# Altium PCB CC3D_V2.PcbDoc (part 2 of 2)
Units mil, origin at the board's own origin, x right, y up, seen from the top; angles counter-clockwise.
Board outline 1417.32 x 1417.32 mil, 2 copper layers (Top Layer, Bottom Layer), stack 61.2 mil thick; 68 components, 0 nets, 260 pads, 77 vias.
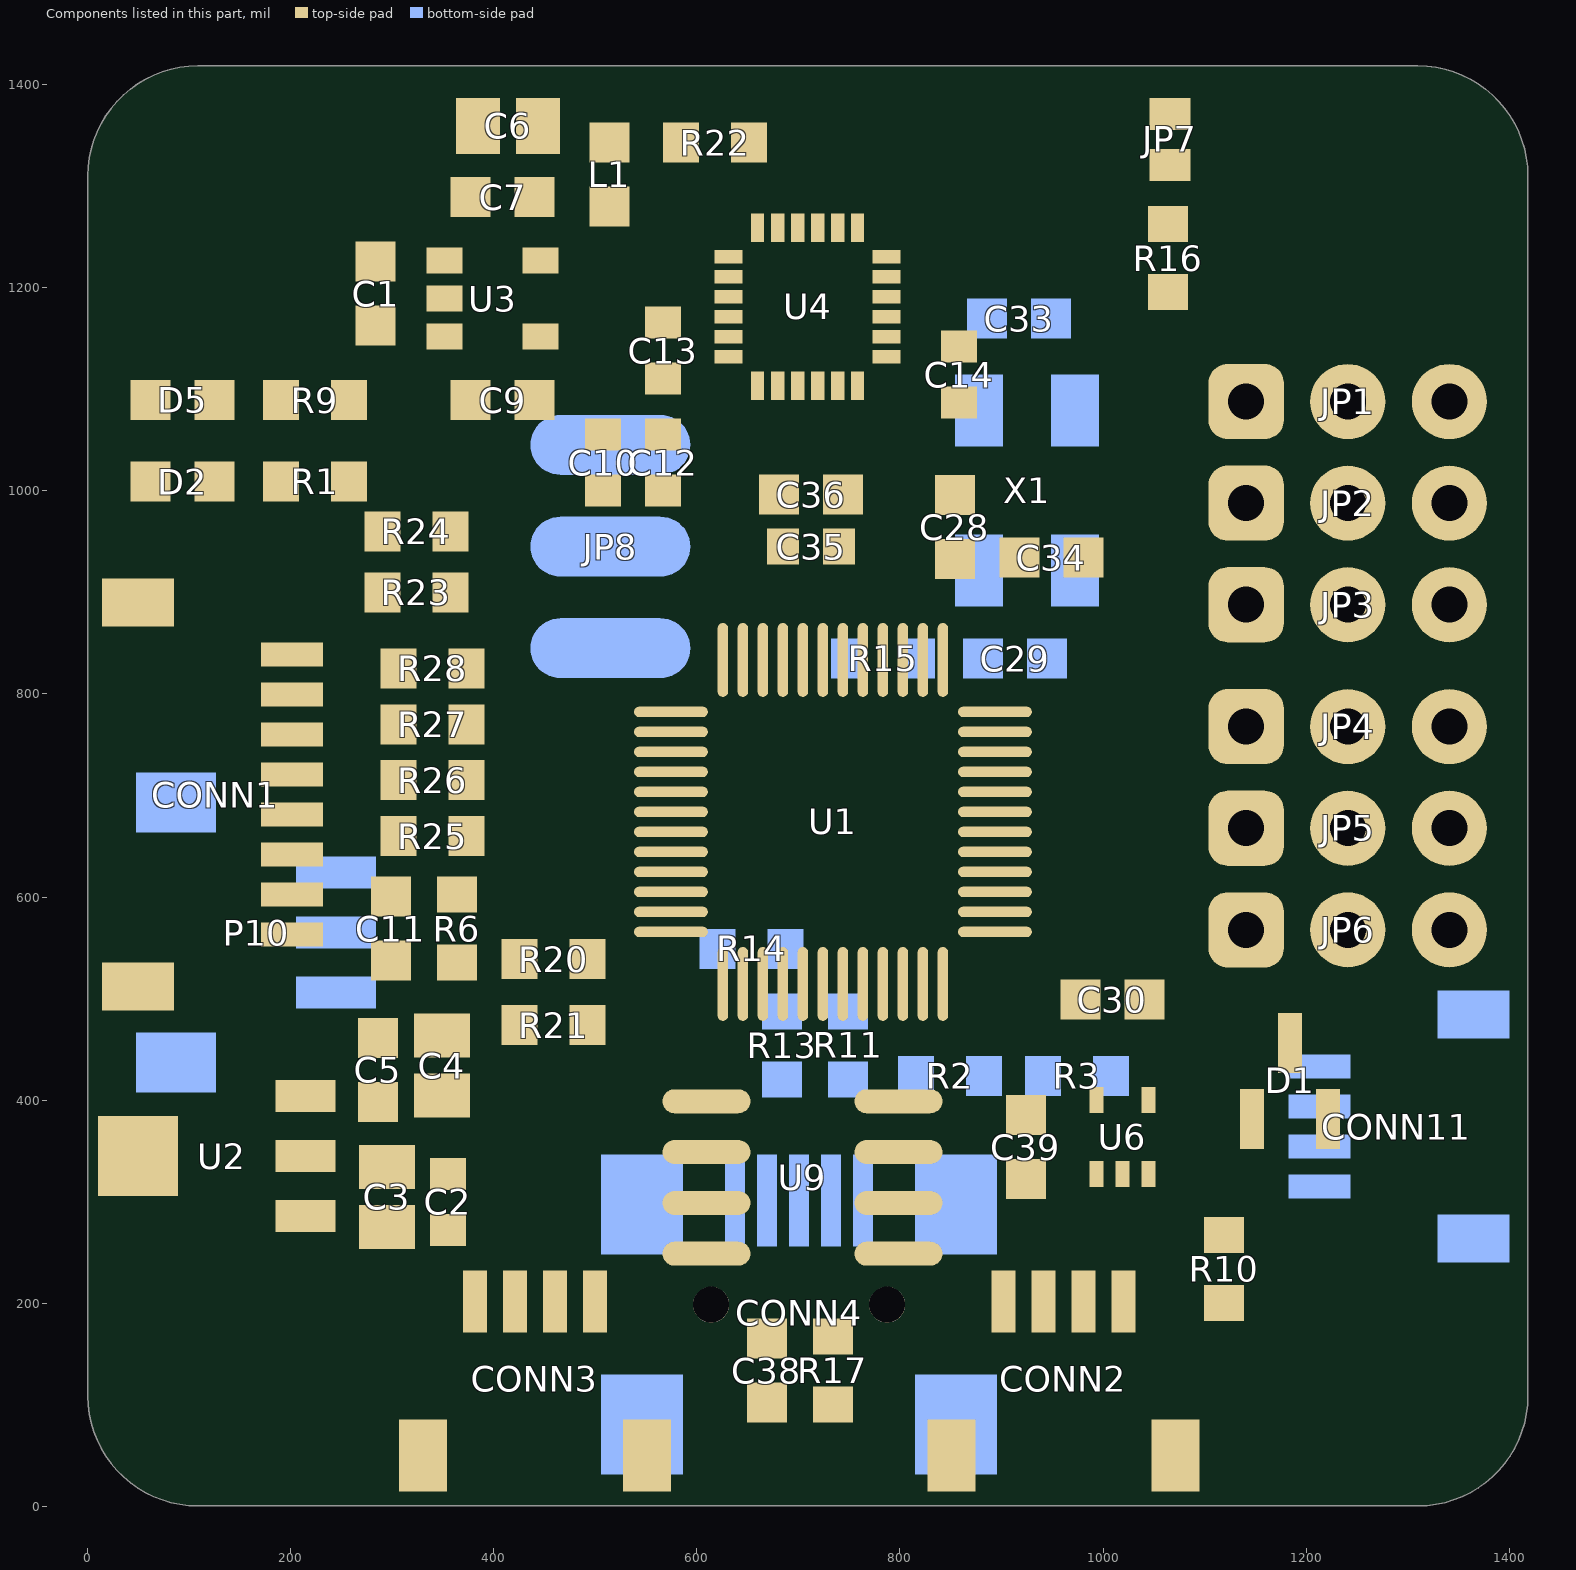
[diagram p2: the components of this part, seen from the top]

## Via types
v1: diameter 28, hole 12, Top Layer to Bottom Layer, tented both sides, 66 vias
v2: diameter 23.62, hole 12, Top Layer to Bottom Layer, tented both sides, 6 vias
v3: diameter 23.62, hole 15.75, Top Layer to Bottom Layer, tented both sides, 5 vias

## Nets (pads, with @x,y where several pads share a name; then routed paths per layer and width w, separated by ;. In a path a pad name is that pad's centre, name@x,y a point inside that pad or via, vN(x,y) a via of type N, cw(c..) or ccw(c..) an arc to the next point about the centre after c; other vN are vias at no path point) (continued)
copper on no net: | length 51734.3
  Top Layer w8: v1@229.15,467.7 ccw(c212.08,484.77) 236.22,484.77 ccw(c260.36,484.77) v1@243.29,467.7 ; v1(236.22,460.63) 236.22,503.94 265.31,533.03 265.31,561.57 299,595.26 ; 268.52,564.78 ccw(c232.8,600.5) 283.31,600.5 ; 281.16,577.42 cw(c299,559.59) 299,584.81 ; 282.18,578.44 ccw(c260.12,600.5) 291.31,600.5 ; v1(503.94,744.09) 522.43,762.58 574.55,762.58 ; v1@503.94,754.09 ccw(c503.94,778.24) 521.01,761.17 ccw(c538.08,744.09) v1@513.94,744.09 ; v1@505.13,782.27 574.55,782.27 ; v1@511.01,776.39 cw(c525.19,762.21) 525.19,782.27 ; v1@511.01,790.54 ccw(c530.97,810.5) 530.97,782.27 ; 574.55,703.53 668.09,703.53 v2(692.91,728.35) ; 574.55,723.21 v2@652.35,723.21 ; 574.55,742.9 v2@624.79,742.9 ; 574.95,1330.85 cw(c556.29,1312.19) 582.68,1312.19 ; v1@575.61,1259.04 ccw(c558.54,1276.11) 582.68,1276.11 ccw(c606.82,1276.11) v1@589.75,1259.04 ; v1(582.68,1204.72) 596.82,1204.72 ; 582.68,1302.68 cw(c622.51,1302.68) 594.35,1330.85 ; 582.68,1322 cw(c603.2,1322) 588.69,1336.51 ; 582.68,1342.52 v1(582.68,1251.97) 582.68,1241.49 613.48,1210.69 631.24,1210.69 ; v1@582.98,1202.75 cw(c587.17,1175.79) 606.46,1195.08 ; v1@584.68,1251.97 ccw(c614.79,1251.97) 593.5,1230.67 ; v1@592.11,1201.39 cw(c596.82,1199.73) 596.82,1204.72 ; v1@592.11,1208.06 ccw(c596.82,1209.72) 596.82,1204.72 ; v1@592.68,1251.97 ccw(c642.11,1251.97) 607.15,1217.02 ; 598.67,742.9 ccw(c598.67,779.28) v2@624.4,753.55 ; 617.98,742.9 ccw(c617.98,759.97) v2@630.05,747.9 ; v1@619.42,1105.97 ccw(c596.79,1131.95) 631.24,1131.95 631.24,1103.69 v1(625.98,1098.43) ; v1@624.67,1099.93 ccw(c612.09,1114.38) 631.24,1114.38 ; 625.73,833.45 625.73,791.59 645.67,771.65 v2(704.72,771.65) v2@700.79,771.65 ; 626.23,723.21 ccw(c626.23,759.59) v2@651.96,733.87 ; 631.24,1191.01 610.54,1191.01 596.82,1204.72 ; 645.55,723.21 ccw(c645.55,740.28) v2@657.61,728.21 ; v2@685.1,728.35 cw(c666.24,728.35) 679.58,715.01 cw(c692.91,701.68) v2@692.91,720.54 ; v2@699.2,766.13 ccw(c685.87,752.8) 685.87,771.65 ccw(c685.87,790.51) v2@699.2,777.18 ; 724.16,514.55 724.16,468.84 769,424 924,424 925.21,425.21 1005.27,425.21 1012.3,418.18 1012.3,382.65 1005.27,375.62 1000.62,375.62 964,339 964,285 980.42,268.58 980.42,201.84 ; 724.16,833.45 724.16,791.59 771.75,744 807.86,744 814,737.86 v1(814,744) ; v1@733.09,890.57 cw(c713.08,870.56) 741.37,870.56 ; v1(740.16,897.64) 741.37,896.42 741.37,835.92 743.84,833.45 ; 741.37,873.54 ccw(c752.74,873.54) 744.7,865.51 ; 741.37,876.43 cw(c761.36,876.43) v1@747.23,890.57 ; 743.84,514.55 743.84,474.16 774,444 1009.11,444 1044.59,408.52 1044.59,400.42 ; 745.06,483.35 ccw(c770.19,483.35) 752.42,465.58 ; 764.47,832.5 763.53,833.45 763.53,881.64 ; v1@769.54,897.17 cw(c748.96,896.2) 763.53,881.64 ; v1@779.06,887.65 ccw(c778.09,867.07) 763.53,881.64 ; v1(779.53,897.64) 763.53,881.64 ; 786.76,1210.69 816.87,1210.69 v1(822.83,1204.72) ; 786.76,1230.38 805.18,1230.38 v1(822.83,1248.03) ; 802.9,514.55 802.9,470.1 809,464 1084,464 v1(1084,459) ; v1@806.93,736.93 ccw(c789.86,719.86) 789.86,744 ccw(c789.86,768.14) v1@806.93,751.07 ; v1@812.83,1248.03 cw(c788.69,1248.03) 805.76,1230.96 cw(c822.83,1213.89) v1@822.83,1238.03 ; 893.72,566 1031.25,566 1089,508.25 1089,494 v1@1120,463 ; 974.89,226.06 ccw(c961.56,239.39) 980.42,239.39 ccw(c999.28,239.39) 985.94,226.06 ; 991.37,319.63 cw(c986.43,314.7) 993.41,314.7 cw(c1000.39,314.7) 995.45,319.63 ; 993.41,307.33 ccw(c1017.33,307.33) v1@1000.41,290.41 ; 993.41,326.64 ccw(c1036.64,326.64) v1@1006.07,296.07 ; 993.41,327.58 993.41,284.59 994,284 v1(999,289) ; 1038.11,415 cw(c1029.42,406.32) 1041.7,406.32 ; 1047.79,464 cw(c1047.79,422.79) v1@1076.93,451.93 ; 1067.1,464 cw(c1067.1,442.1) v1@1082.59,457.59 ; 1100.1,482.9 cw(c1076.2,459) v1@1110,459 ; 1109.76,473.24 ccw(c1120,483.49) v1@1120,469
  Top Layer w10: 178.32,558.12 ccw(c166.69,546.49) 166.69,562.94 ccw(c166.69,579.38) 178.32,567.75 ; 201.84,562.94 165.06,562.94 104.53,623.47 104.53,794.41 149.69,839.58 149.69,874.69 175,900 290.53,900 ; 201.84,602.31 235.69,602.31 ; 201.84,641.68 251.68,641.68 270,660 306.53,660 ; 201.84,681.05 246.05,681.05 280,715 ; 201.84,720.42 235.42,720.42 ; 201.84,759.79 239.79,759.79 276.59,796.59 276.59,816.59 285,825 ; 218.77,604.97 cw(c225.73,594.48) 234.62,603.38 ; 220.36,605.49 cw(c221.76,579.67) 240.04,597.96 ; 220.54,717.23 ccw(c220.54,745.46) 240.5,725.5 ; 220.54,727.23 ccw(c220.54,779.6) 257.57,742.57 ; 224.3,596.63 cw(c232.62,584.08) 243.27,594.73 ; 225.35,636.86 cw(c236.98,625.23) 236.98,641.68 cw(c236.98,658.12) 225.35,646.49 ; 225.35,676.23 cw(c236.98,664.6) 236.98,681.05 cw(c236.98,697.49) 225.35,685.86 ; 225.35,754.97 cw(c236.98,743.34) 236.98,759.79 cw(c236.98,776.23) 225.35,764.6 ; 225.63,597.79 cw(c235.69,588.85) 235.69,602.31 ; 225.63,606.83 ccw(c235.69,615.76) 235.69,602.31 ; 225.69,715.97 cw(c235.42,707.57) 235.42,720.42 ; 225.69,724.87 ccw(c235.42,733.27) 235.42,720.42 ; v2@235.34,231.4 cw(c223.71,219.78) 240.16,219.78 cw(c256.6,219.78) v2@244.97,231.4 ; v2(240.16,236.22) 240.16,145.67 279.53,106.3 582.68,106.3 592.52,96.46 592.52,33.46 603.25,22.73 794.39,22.73 811.02,39.37 811.02,94.26 817.76,101 1104.61,101 v3(1119,86.61) ; 244.71,729.71 cw(c306.53,667.88) 306.53,755.32 ; 257.47,1074.32 cw(c257.47,1047.23) 276.62,1066.38 ; 257.47,1089 257.47,1085.53 324,1019 324,871 335,860 425,860 455.37,829.63 v1(455.37,790.82) ; 261.78,746.78 cw(c306.53,702.02) 306.53,765.32 ; 270.18,1087.03 ccw(c304.5,1087.03) 280.23,1062.77 ; 274.23,759.23 cw(c286.86,746.61) 298.35,760.27 ; 274.23,814.23 cw(c286.86,801.61) 298.35,815.27 ; 275.05,815.05 cw(c294.21,795.89) 305.41,820.56 ; 278.85,763.85 cw(c306.53,736.16) 306.53,775.32 ; 281.54,891.01 ccw(c259.83,869.3) 259.83,900 ccw(c259.83,930.7) 281.54,908.99 ; 281.54,951.01 ccw(c259.83,929.3) 259.83,960 ccw(c259.83,990.7) 281.54,968.99 ; 281.94,766.94 cw(c293.9,754.98) 304.79,767.92 ; 281.94,821.94 cw(c293.9,809.98) 304.79,822.92 ; 285.26,825.26 cw(c300.58,809.93) 309.55,829.66 ; 290.53,960 205,960 131.69,886.69 131.69,847.03 84,799.34 84,614 164,534 239,534 248.31,543.31 248.31,589.69 235.69,602.31 ; 295.4,763.86 ccw(c285,758.13) 285,770 ; 295.4,776.14 cw(c285,781.87) 285,770 ; 295.4,818.86 ccw(c285,813.13) 285,825 ; 295.4,831.14 cw(c285,836.87) 285,825 ; 296.62,707.04 ccw(c280,693.68) 280,715 ; 296.62,722.97 cw(c280,736.32) 280,715 ; 297.54,651.01 ccw(c275.83,629.3) 275.83,660 ccw(c275.83,690.7) 297.54,668.99 ; 299,595.26 299,600.5 362.03,600.5 364,602.47 402.47,602.47 444.47,644.47 574.55,644.47 ; 306.53,715 280,715 ; 306.53,770 285,770 ; 306.53,825 285,825 ; 309.38,590.11 cw(c334.45,565.04) 334.45,600.5 cw(c334.45,635.95) 309.38,610.88 ; 319,1225.5 319,1159 326.4,1151.6 351.76,1151.6 ; 326.57,600.5 ccw(c326.57,637.92) 353.04,611.46 ; 336.09,600.5 cw(c336.09,576.52) 353.04,593.47 ; 341.32,1146.09 ccw(c328.02,1132.78) 328.02,1151.6 ccw(c328.02,1170.42) 341.32,1157.11 ; 357.46,900 623.62,900 645.42,878.2 645.42,833.45 ; 357.46,960 390.39,960 432.39,918 633.18,918 665.1,886.08 665.1,833.45 ; 366.46,891.01 cw(c388.17,869.3) 388.17,900 cw(c388.17,930.7) 366.46,908.99 ; 366.46,951.01 cw(c388.17,929.3) 388.17,960 cw(c388.17,990.7) 366.46,968.99 ; 373.46,715 410,715 441.16,683.84 574.55,683.84 ; 373.46,770 400,770 ; 373.46,825 415,825 425,815 425,780 450,755 ; 374,659 409,659 414,664 574.39,664 574.55,664.16 ; 374.96,593.47 cw(c396.67,571.76) 396.67,602.47 cw(c396.67,633.17) 374.96,611.46 ; 382.46,649.04 cw(c406.5,625) 406.5,659 ; 382.46,667.02 ccw(c401.83,686.4) 401.83,659 ; 382.46,706.01 cw(c404.17,684.3) 404.17,715 cw(c404.17,745.7) 382.46,723.99 ; 382.46,816.01 cw(c404.17,794.3) 404.17,825 cw(c404.17,855.7) 382.46,833.99 ; 383.38,762.04 cw(c400,748.68) 400,770 ; 383.38,777.97 ccw(c400,791.32) 400,770 ; 398.7,502.95 ccw(c364.62,537.03) 412.82,537.03 ; 415.77,520.02 ccw(c398.77,537.03) 422.82,537.03 ; 416.2,520.45 cw(c425.53,511.11) 425.53,524.31 ; 416.54,463.04 cw(c394.84,441.33) 425.54,441.33 cw(c456.24,441.33) 434.53,463.04 ; 416.54,549.96 ccw(c394.83,571.67) 425.53,571.67 ccw(c456.24,571.67) 434.53,549.96 ; 425.54,488.68 ccw(c425.54,524.14) 450.6,499.07 ; 429.76,740.24 cw(c403.52,714) v1@440.63,714 ; 430.77,774.23 ccw(c462.85,806.31) v1@464.28,760.96 ; 438.25,475.97 cw(c464.2,475.97) 445.85,494.32 ; v1(440.94,996.06) 503.94,996.06 507.87,1000 566.93,1000 ; 443.27,726.73 400,770 ; 447.11,757.89 ccw(c463.85,774.64) v1@464.6,750.97 ; v1@447.31,989.7 cw(c462.67,974.34) 462.67,996.06 cw(c462.67,1017.79) v1@447.31,1002.43 ; v1@449,797.18 ccw(c433.64,812.55) 455.37,812.55 ccw(c477.09,812.55) v1@461.73,797.18 ; 455.6,225.35 ccw(c443.97,236.98) 460.42,236.98 ccw(c476.86,236.98) 465.23,225.35 ; v3@455.81,577.86 cw(c448.12,570.17) 459,570.17 ; 459,562.3 cw(c481.01,562.3) v3@465.45,577.86 ; 460.42,201.84 460.42,282.58 440,303 440,365 394.82,410.18 394.82,499.07 425.53,529.78 425.53,539 425.53,585.53 464.79,624.79 574.55,624.79 ; v3@460.63,589.49 ccw(c460.63,610.87) 475.75,595.75 ; v3@467.44,582.68 cw(c478.94,582.68) 470.81,590.81 ; 470.45,996.06 ccw(c470.45,1035.45) 498.31,1007.6 ; 489.46,996.06 cw(c489.46,983.55) 498.31,992.4 ; 492.47,539 519.2,565.73 574.55,565.73 ; 492.47,553.68 ccw(c492.47,589.14) 517.53,564.07 ; 494.97,225.35 ccw(c483.34,236.98) 499.79,236.98 ccw(c516.23,236.98) 504.6,225.35 ; 496.06,1080.69 ccw(c531.47,1080.69) 506.43,1055.65 ; 496.06,1104.83 ccw(c555.61,1104.83) 513.51,1062.72 ; 499.79,201.84 499.79,284 465,318.79 465,370 425.54,409.46 425.54,474 459,507.46 459,579 485.1,605.1 574.55,605.1 ; 503.62,1269.28 cw(c478.55,1244.22) 514,1244.22 cw(c549.45,1244.22) 524.38,1269.28 ; 505.18,540.97 cw(c531.13,540.97) 512.78,559.32 ; 510.37,1054.59 cw(c530.66,1034.31) 530.66,1062.99 ; 514,1279.67 514,1155.73 496.06,1137.8 496.06,1062.99 645.67,1062.99 659.79,1077.11 659.79,1103.41 ; 517.44,992.4 cw(c535.79,974.05) 535.79,1000 cw(c535.79,1025.94) 517.44,1007.6 ; 517.44,1047.52 cw(c554.8,1010.16) 554.8,1062.99 ; 520,1062.99 cw(c520,1010.16) 557.36,1047.52 ; v1(527.56,1110.24) 566.93,1110.24 608.33,1151.64 631.24,1151.64 ; v1@533.92,1103.87 cw(c549.29,1088.51) 549.29,1110.24 cw(c549.29,1131.96) v1@533.92,1116.6 ; 544.15,1062.99 cw(c544.15,1034.3) 564.43,1054.59 ; 557.36,992.4 ccw(c539.01,974.05) 539.01,1000 ccw(c539.01,1025.95) 557.36,1007.6 ; 557.36,1102.64 ccw(c539.01,1084.29) 539.01,1110.24 ccw(c539.01,1136.18) 557.36,1117.84 ; 568.9,1120.98 ccw(c568.9,1142.18) 583.89,1127.19 ; 569.43,1054.59 cw(c589.71,1034.3) 589.71,1062.99 ; 573.2,344.18 ccw(c561.57,332.56) 561.57,349 ccw(c561.57,365.44) 573.2,353.82 ; 574.55,585.42 662.32,585.42 v1(667.58,590.68) ; 576.5,1047.52 cw(c613.86,1010.16) 613.86,1062.99 ; 579.65,1110.24 cw(c610.35,1110.24) 588.64,1131.94 ; 609.51,349 554,349 535.2,367.8 535.2,425.2 569,459 629,459 645.42,475.42 645.42,514.55 ; 609.51,399 659,399 684.79,424.79 684.79,514.55 ; 614.71,479 ccw(c614.71,494.38) 625.58,483.5 ; 624,484 619,479 ; 625.53,483.43 cw(c619,486.03) 619,479 ; 633.14,585.42 ccw(c633.14,625.13) v1@661.22,597.05 ; v1@634,623 ccw(c634,640.34) 646.26,628.08 ; v1(634,654) 634,659 648.32,673.32 ; 639.44,469.44 ccw(c625.53,483.35) 645.2,483.35 ; v1@642.85,655.65 cw(c662.33,659.3) 648.32,673.32 ; v1@643,614 cw(c669.11,614) 650.65,632.46 ; 645.82,394.18 cw(c657.45,382.56) 657.45,399 cw(c657.45,415.44) 645.82,403.82 ; 665.1,514.55 665.1,455.1 644,434 574,434 553.2,413.2 553.2,384.8 563.81,374.19 650.91,374.19 665.82,359.28 726.09,299 798.49,299 ; 669,102.5 669.43,102.5 v3(685.04,118.11) ; 670.72,985.68 cw(c636.15,951.11) 685.04,951.11 ; 677.44,935.31 cw(c659.7,917.57) 684.79,917.57 ; 677.44,954.45 ccw(c659.09,972.8) 685.04,972.8 ccw(c710.99,972.8) 692.64,954.45 ; 677.79,992.75 cw(c660.29,975.25) 685.04,975.25 ; v3@678.23,118.11 cw(c661.79,118.11) 673.41,106.48 cw(c685.04,94.86) v3@685.04,111.3 ; 681.1,996.06 685.04,992.13 685.04,944.88 ; v1(682.77,626.41) 681.59,626.41 679.68,628.32 679,629 679,619 702,596 702,572.82 704.47,570.34 704.47,514.55 ; 684.79,833.45 684.79,944.88 ; 684.79,916.36 cw(c711.59,916.36) 692.64,935.31 ; 685.04,970.11 cw(c707.05,970.11) 691.49,985.68 ; v1@691.3,623.51 ccw(c711.49,616.67) 696.41,601.59 ; 704.47,833.45 704.47,911.94 734.36,941.83 ; 713.76,921.23 cw(c740.16,894.83) 740.16,932.17 ; v1@718.35,624.76 cw(c725.77,616.07) 733.85,624.15 ; v1@719,615 cw(c719,557.06) 759.97,598.03 ; v1(719,624) 734,624 ; v1@719,625 cw(c719,591.2) 742.9,615.1 ; v1@724.84,617.16 cw(c732.82,607.82) 741.5,616.5 ; 725.01,176.46 ccw(c703.3,198.17) 734,198.17 ccw(c764.7,198.17) 742.99,176.46 ; 725.14,932.62 ccw(c714.85,942.91) 729.41,942.91 ; v1@726.94,619.77 cw(c734,616) 734,624 ; v1@726.94,628.23 ccw(c734,632) 734,624 ; v1@729,575 cw(c729,529.13) 761.44,561.56 ; v1(729,584) 739,584 763.53,559.47 763.53,514.55 ; v1@729,585 cw(c729,563.27) 744.36,578.64 ; 734,167.47 734,234 744,244 ; v1@751.85,1296.79 cw(c736.48,1281.42) 758.21,1281.42 cw(c779.94,1281.42) v1@764.58,1296.79 ; 758.21,1103.41 782.42,1103.41 v1(799.21,1086.62) 858.27,1086.62 ; 758.21,1258.92 v1(758.21,1303.15) ; 762.18,244.18 ccw(c750.55,232.56) 750.55,249 ccw(c750.55,265.44) 762.18,253.82 ; 762.18,294.18 ccw(c750.55,282.56) 750.55,299 ccw(c750.55,315.44) 762.18,303.82 ; v1(775.59,677.16) 780.84,677.16 796.03,661.97 850.16,661.97 852.34,664.16 893.45,664.16 ; 783.21,514.55 783.21,574.79 734,624 ; v1@790.21,1086.62 ccw(c768.49,1086.62) 783.85,1101.98 ccw(c799.21,1117.34) v1@799.21,1095.62 ; 798.49,249 749,249 744,244 ; 802.9,833.45 802.9,793.29 844.03,752.15 844.03,725.85 829,710.82 ; 803.11,802.25 ccw(c825.27,802.25) 809.6,786.58 ; v1@805.58,1080.25 cw(c820.94,1064.89) 820.94,1086.62 cw(c820.94,1108.34) v1@805.58,1092.98 ; v1@816.22,566.22 cw(c800.86,550.86) 822.58,550.86 cw(c844.31,550.86) v1@828.95,566.22 ; 822.58,514.55 v1(822.58,572.58) ; v1@824.34,695.34 ccw(c813.1,706.58) 829,706.58 ; v1@829.03,688.97 v1(830.71,688.97) ; v1@829,689 829,710.82 ; v1@836.22,696.09 cw(c847.63,710.82) 829,710.82 ; 842.27,514.55 842.27,505.73 844,504 879,504 ; 842.27,833.45 842.27,920.77 854,932.5 ; 842.27,868.73 cw(c917.77,868.73) 864.38,922.12 ; 842.27,892.87 cw(c893.63,892.87) 857.31,929.19 ; 842.42,514.7 ccw(c868.26,540.55) 868.26,504 ; 848.7,1079.02 ccw(c830.35,1060.67) 830.35,1086.62 ccw(c830.35,1112.56) 848.7,1094.22 ; 893.45,565.73 893.72,566 ; 893.45,605.1 778.35,605.1 730.05,653.41 671.59,653.41 655.77,637.59 642.18,624 v1@639,624 ; 893.45,624.79 1049.79,624.79 1092.73,667.73 ; 893.45,644.47 892.95,643.97 764.94,643.97 735.6,673.32 648.32,673.32 ; 893.45,683.84 1022.03,683.84 1079,740.82 1079,826 1140.73,887.73 ; 893.45,703.53 1003.53,703.53 v1(1024,724) ; 893.45,723.21 984.57,723.21 1054,792.64 1054,904 1137.73,987.73 1140.73,987.73 ; 893.45,742.9 962.9,742.9 1024,804 1024,917.7 1059.06,952.76 1059.06,1006.06 1140.73,1087.73 ; 893.45,762.58 944.08,762.58 v1(964,782.5) ; 919,784 919,814 ; 919,796.43 ccw(c938.81,796.43) 924.8,782.42 ; v1@955,782.5 cw(c933.27,782.5) 948.64,767.14 cw(c964,751.77) v1@964,773.5 ; v1(969,654) 1027,654 1140.73,767.73 ; v1@975.36,647.64 cw(c990.73,632.27) 990.73,654 cw(c990.73,675.73) v1@975.36,660.36 ; 1014.97,225.35 ccw(c1005.24,235.08) 1019,235.08 ; v1@1015,724 cw(c993.27,724) 1008.64,708.64 cw(c1024,693.27) v1@1024,715 ; 1017.66,320.34 cw(c1009.61,312.29) 1021,312.29 ; v1@1017.64,994.55 ccw(c1003.18,1009) 1023.62,1009 ; 1019,238.88 ccw(c1038.13,238.88) 1024.6,225.35 ; 1019,327.58 1021,325.58 1021,305.18 1026,300.18 1026,277.82 1019,270.82 1019,202.62 1019.79,201.84 1119.63,201.84 1124,197.47 ; v1@1023.62,988.19 1023.62,1253.62 1032.47,1262.47 ; 1023.62,1010.83 ccw(c1046.64,1010.83) v1@1030.36,994.55 ; 1024.6,197.02 cw(c1036.23,185.39) 1036.23,201.84 cw(c1036.23,218.28) 1024.6,206.65 ; 1052.8,1253.72 ccw(c1032.47,1234.46) 1032.47,1262.47 ; 1052.8,1271.21 cw(c1032.47,1290.47) 1032.47,1262.46 ; 1064,1262.47 1032.47,1262.47 ; 1080.99,930.99 cw(c1140.73,871.24) 1140.73,955.73 ; 1083.19,201.84 cw(c1083.19,166.69) 1108.04,191.54 ; 1088.23,938.23 ccw(c1038.72,987.73) 1108.73,987.73 ; 1089.47,201.84 ccw(c1089.47,228.09) 1108.04,209.53 ; 1098.06,948.06 cw(c1140.73,905.38) 1140.73,965.73 ; 1105.3,955.3 ccw(c1072.86,987.73) 1118.73,987.73 ; 1108.73,767.73 cw(c1031.48,767.73) 1086.11,713.11 cw(c1140.73,658.48) 1140.73,735.73 ; 1108.73,887.73 cw(c1031.48,887.73) 1086.11,833.11 cw(c1140.73,778.48) 1140.73,855.73 ; 1108.73,1087.73 cw(c1031.48,1087.73) 1086.11,1033.11 cw(c1140.73,978.48) 1140.73,1055.73 ; 1110.01,191.54 cw(c1088.3,169.83) 1119,169.83 cw(c1149.7,169.83) 1127.99,191.54 ; 1111.2,655.43 ccw(c1092.74,647.74) 1092.74,667.73 ; 1111.2,680.04 cw(c1092.74,687.73) 1092.74,667.73 ; v2@1114.18,169.92 ccw(c1102.56,181.55) 1119,181.55 ccw(c1135.44,181.55) v2@1123.82,169.92 ; 1118.73,767.73 cw(c1065.62,767.73) 1103.18,730.18 cw(c1140.73,692.62) 1140.73,745.73 ; 1118.73,887.73 cw(c1065.62,887.73) 1103.18,850.18 cw(c1140.73,812.62) 1140.73,865.73 ; 1118.73,1087.73 cw(c1065.62,1087.73) 1103.18,1050.18 cw(c1140.73,1012.62) 1140.73,1065.73 ; v2(1119,165.1) 1119,200.53 ; v1(1120,459) v1@1120,463 ; 1140.73,667.73 1092.73,667.73 ; 235.42,720.42 285,770 ; 619,479 561,479 517.2,435.2 517.2,360.34 553.36,324.19 663.81,324.19 744,244 ; v1@639,624 637.18,624 634,620.82 v1(634,614) v1@639,624
  Top Layer w12: 566.93,1165.35 572.9,1171.32 631.24,1171.32 ; 575.79,1158.46 cw(c606.84,1127.41) 606.84,1171.32 ; 786.76,1151.64 848.36,1151.64 858.27,1141.73 ; 808.85,1151.64 cw(c808.85,1094.29) 849.41,1134.84 ; 837.82,1151.64 cw(c837.82,1123.26) 857.89,1143.33 ; 924,385.5 985.04,385.5 993.41,393.86 993.41,400.42 ; 933.68,375.82 cw(c957.04,352.46) 957.04,385.5 cw(c957.04,418.53) 933.68,395.17 ; 969.49,385.5 ccw(c969.49,418.43) 992.78,395.14 ; 1044.59,327.58 1045,327.17 1045,298 v1(1075.54,267.46) ; v1@1067.54,267.46 ccw(c1048.22,267.46) 1061.88,281.12 ccw(c1075.54,294.78) v1@1075.54,275.46
  Top Layer w15: v1@1009,532.5 cw(c1009,516.81) 1020.1,527.9 cw(c1031.19,539) v1@1015.5,539 ; v1(1009,539) 1040.5,507.5 1040.5,499 ; v1@1013.68,534.32 cw(c978.37,499) 1028.31,499
  Top Layer w20: 125.5,1009 190.53,1009 ; 125.5,1089 190.53,1089 ; 132.35,1002.15 cw(c148.88,985.62) 148.88,1009 cw(c148.88,1032.38) 132.35,1015.85 ; 132.35,1082.15 cw(c148.88,1065.62) 148.88,1089 cw(c148.88,1112.38) 132.35,1095.85 ; 185.08,1003.54 ccw(c171.91,990.37) 171.91,1009 ccw(c171.91,1027.63) 185.08,1014.46 ; 185.08,1083.54 ccw(c171.91,1070.37) 171.91,1089 ccw(c171.91,1107.63) 185.08,1094.46 ; 201.84,838.53 v1(258.53,838.53) ; 214.8,285.94 284.53,285.94 295,275.47 ; 235.68,285.94 cw(c235.68,222.06) 280.85,267.23 ; 284,1225.5 319,1225.5 350.85,1225.5 351.76,1226.4 ; 290.85,1218.65 cw(c307.38,1202.12) 307.38,1225.5 cw(c307.38,1248.88) 290.85,1232.35 ; 298.03,272.44 295,275.47 ; 309.14,267.23 cw(c329.04,247.34) 329.04,275.47 cw(c329.04,303.61) 309.14,283.71 ; 331.84,275.47 cw(c331.84,251.24) 348.97,268.38 ; v3(334.65,216.54) 334.65,275.47 ; 348.56,268.83 ccw(c334.65,257.58) 334.65,275.47 ; 351.97,275.47 355,272.44 v1(396.68,272.44) 381.68,257.44 381.68,201.84 ; 352.91,268.38 cw(c283.44,198.91) 381.68,198.91 ; 381.68,226.57 cw(c442.55,226.57) v1@399.51,269.61 ; 381.68,251.23 cw(c399.02,251.23) v1@397.12,268.47 ; 433.65,1282.15 cw(c403.24,1251.74) 446.24,1251.74 ; 440.5,1289 446.24,1283.25 446.24,1226.4 ; 609.51,249 659,249 669,239 669,165.49 670.83,165.49 ; 641.01,247.19 cw(c641.01,199.38) 674.82,233.18 ; 641.46,247.25 cw(c648.39,220.4) 668,240 ; 662.15,172.34 ccw(c645.62,188.88) 669,188.88 ccw(c692.38,188.88) 675.85,172.34 ; v1(683.14,380.14) 702,399 798.49,399 ; 734,100.54 734,102.33 ; 798.49,349 879.25,349 915.75,385.5 924,385.5 ; 859,264 868.75,264 882.4,250.35 949.31,250.35 950.11,251.16 v1(950.11,254.35) ; 879,504 972.5,504 977,499.5 ; 893.38,363.13 cw(c924,332.51) 924,375.81 ; 910.66,927.15 cw(c890.51,907.01) 919,907.01 ; 917.5,934 919,932.51 919,814 ; 919,914.23 cw(c937.28,914.23) 924.35,927.15 ; 930.8,250.35 ccw(c930.8,273.66) v1@947.28,257.18 ; 942.05,504 cw(c942.05,463.55) 970.65,492.15 ; v1@963.75,539.25 cw(c942.42,517.91) 968.98,503.6 ; v1@966.17,531.17 cw(c940.03,505.03) 977,505.03 ; v1(969,534) 977,526 977,499.5 ; 970.65,505.85 ccw(c955.34,521.17) 977,521.17 ; v1@977,523.6 ccw(c1002.1,523.6) 984.35,505.85 ; 977.5,499 977,499.5 ; 980.38,522.62 cw(c961.08,503.32) 987.48,496.38 ; 982.75,520.25 cw(c967.11,504.6) 986.58,494.11 ; v1(1029.71,363.29) 1030.42,364 1099,364 1116.6,381.6 ; 1060.51,1267.92 ccw(c1047.91,1280.53) 1065.73,1280.53 ; 1064,1195.53 v1(1112.47,1195.53) ; 1064,1262.47 1065.73,1264.2 1065.73,1320.73 ; 1065.73,1281.66 ccw(c1085.17,1281.66) 1071.42,1267.92 ; 1071.42,1190.08 cw(c1084.6,1176.91) 1084.6,1195.53 cw(c1084.6,1214.16) 1071.42,1200.99 ; v1(1129,329) v1@1129,334 ; 1184,456.4 1191.6,464 ; 1185.28,455.12 cw(c1206.72,433.68) 1206.72,464 ; v1@1221.09,476.74 cw(c1191.6,504.49) 1191.6,464 ; v1(1224,474) 1214,464 1191.6,464 ; 295,275.47 334.65,275.47
  Top Layer w22: v1(134,779) 134,784 149.16,799.16 201.84,799.16 ; v1@137,779 cw(c156.31,779) 142.66,792.66 ; 421.05,157.27 421.05,201.84 ; v1(864,204) 899.51,204 901.68,201.84 ; 939,129 941.05,131.05 941.05,201.84 ; 1116.6,381.6 1146.6,381.6 ; 1221.4,381.6 1266.4,381.6 1269,379
  Top Layer w25: v1(49,1144) 74,1169 169,1169 225.5,1225.5 284,1225.5 ; 57.42,1003.92 cw(c41.55,988.05) 64,988.05 ; 64,1009 64,964 94.17,933.83 ; 94.18,933.83 106.19,921.82 106.19,857.6 33.23,784.64 33.23,619.77 148.5,504.5 ; 214.8,404.06 280.51,404.06 286.06,398.5 343.03,398.5 ; v1(240.5,1162.5) 284,1162.5 ; 255.32,404.06 cw(c255.32,367.76) 280.98,393.42 ; 257.47,1009 v1(257.47,1047.28) ; 306.59,398.5 ccw(c306.59,440.98) 336.62,410.95 ; v1(334,1089) 377.5,1089 ; v1(334,1289) 377.5,1289 ; v1(334,1359) 380.53,1359 ; 351.76,1189 v1(394,1189) ; 378,1352.53 ccw(c362.37,1336.9) 362.37,1359 ccw(c362.38,1381.1) 378,1365.47 ; 440.5,1089 440.5,1145.85 446.24,1151.6 ; 492.47,474 492.47,539 ; 740.16,948.82 740.16,976.38 744.1,980.32 ; 740.16,969.21 cw(c770.95,969.21) 749.18,990.98 ; 744.1,996.06 v1(787.4,996.06) ; v1@787.4,995.5 854,995.5 ; 854,932.5 916.01,932.5 917.5,934 ; 896.54,932.5 ccw(c896.54,954.96) 912.42,939.08 ; 975.42,928.92 cw(c954.09,907.59) 984.25,907.59 ; 980.5,934 984.25,930.25 v1(984.25,834.65) ; v1(1075.54,267.46) 1119,267.46
  Top Layer w30: v3(49,279.53) 49,344.2 49.8,345 214.8,345 230,345 240.47,334.53 295,334.53 301.97,327.56 355,327.56 ; 67.04,327.77 cw(c108.64,286.17) 108.64,345 cw(c108.64,403.83) 67.04,362.23 ; 229.11,345.53 ccw(c255.67,372.09) 255.67,334.53 ; v1(282.04,225.83) 282.04,162.84 303.15,141.73 622.05,141.73 622.05,55.12 779.53,55.12 779.53,102.36 806.17,129 939,129 1134,129 1269,264 1269,379 1269,481.33 1240.73,509.59 1240.73,567.73 ; 286.06,461.5 286.06,502.6 299,515.53 299,537.5 ; 295,533.5 299,537.5 ; 305.61,339.23 ccw(c333.79,367.41) 333.79,327.56 ; 343.03,398.5 349,404.47 ; 349,400.53 354.47,400.53 400,355 v1(410,355) ; 349,467.46 349,520.54 364,535.54 ; v1@349,497.52 cw(c400.05,497.52) 363.95,533.61 ; v1@349.39,499.99 cw(c399.26,500.27) 364,535.53 ; 361.56,404.47 ccw(c388.19,404.47) 369.36,385.64 ; 394.64,360.36 ccw(c410,375.73) v1@410,354 ; 440.5,1289 440.5,1352.03 447.46,1359 497.66,1359 514,1342.66 ; 440.5,1329.71 cw(c466.91,1329.71) 448.23,1348.39 ; 463.24,1359 cw(c463.24,1291.9) 510.69,1339.35 ; v1(467.08,412.08) 469,414 469,450.53 492.46,474 ; v1@469,409.44 cw(c554.19,409.44) 494.37,470.1 ; 469,440.21 cw(c498.71,440.21) 492.99,469.36 ; v1(909,289) 924,304 ; v1@909.07,288 ccw(c907.96,304) 924,304 ; v1@909.7,288.29 ccw(c875.92,322.5) 924,322.5 924,304 ; v1@918.25,298.25 ccw(c906.33,310.18) 920.16,319.82 ; 1225.18,552.18 cw(c1187.62,514.62) 1240.73,514.62 cw(c1293.85,514.62) 1256.29,552.18 ; 299,537.5 362.03,537.5 364,535.54
  Top Layer w50: 1340.73,1087.73 1340.73,1094.51
  Top Layer w85: 1240.73,567.73 1240.73,667.73 1240.73,767.73 1240.73,887.73 1240.73,987.73 1240.73,1087.73 ; 1340.73,567.73 1340.73,667.73 1340.73,767.73 1340.73,887.73 1340.73,987.73 1340.73,1087.73
  Bottom Layer w8: v1@229.15,453.56 cw(c212.08,436.49) 236.22,436.49 cw(c260.36,436.49) v1@243.29,453.56 ; v1(236.22,460.63) 236.22,374.02 380.24,230 910,230 924.11,244.11 924.11,265.12 939.34,280.35 990.35,280.35 v1(999,289) ; v1(503.94,744.09) 551.18,744.09 653.54,846.46 653.54,1118.11 639.77,1131.89 580.71,1131.89 555.12,1157.48 555.12,1224.41 v1(582.68,1251.97) ; v1(503.94,783.46) 566.93,783.46 625.98,842.52 v1(625.98,1098.43) ; v1@511.01,737.02 cw(c528.08,719.95) 528.08,744.09 cw(c528.08,768.24) v1@511.01,751.17 ; v1@511.01,776.39 cw(c528.08,759.32) 528.08,783.46 cw(c528.08,807.61) v1@511.01,790.54 ; v1@572.68,1251.97 cw(c548.54,1251.97) 565.61,1234.9 cw(c582.68,1217.83) v1@582.68,1241.97 ; v1(582.68,1204.72) 637.8,1204.72 672.98,1169.54 672.98,834.39 602.36,763.78 602.36,724.41 614.17,712.6 641.73,712.6 v2(657.48,728.34) ; v1@589.75,1197.65 cw(c606.82,1180.58) 606.82,1204.72 cw(c606.82,1228.87) v1@589.75,1211.8 ; v1@618.91,1091.35 cw(c601.84,1074.28) 625.98,1074.28 cw(c650.13,1074.28) v1@633.06,1091.35 ; v2(629.92,748.03) 641.73,759.84 641.73,775.59 692.91,826.77 692.91,1051.85 822.83,1181.77 ; v2@649.67,728.34 cw(c630.81,728.34) 644.14,715.01 cw(c657.48,701.68) v2@657.48,720.53 ; 684.76,752.25 cw(c664.15,731.65) v2@693.1,728.32 ; v2@688.19,734.57 ccw(c680.95,744.09) 692.91,744.09 ; v2(692.91,728.35) 692.91,744.09 ; 696.47,740.54 cw(c685.17,729.23) v2@701.05,727.41 ; v2@697.64,734.57 cw(c704.88,744.09) 692.91,744.09 ; v1@733.09,890.57 cw(c716.02,873.5) 740.16,873.5 cw(c764.3,873.5) v1@747.23,890.57 ; 740.16,854.86 ccw(c768.25,854.86) 748.38,835 ; 740.16,874.18 ccw(c787.56,874.18) 754.04,840.66 ; v1@740.16,893.49 ccw(c806.88,893.49) 759.7,846.31 ; v1@740.16,907.64 ccw(c740.16,931.78) 757.23,914.71 ccw(c774.3,897.64) v1@750.16,897.64 ; 750,834.65 740.16,844.49 v1(740.16,897.64) 842.52,1000 940.94,1000 972.44,1031.5 ; 802.07,897.64 ccw(c802.07,985.33) 864.08,923.32 ; 807.23,846.31 ccw(c783.82,869.73) 816.93,869.73 ccw(c850.04,869.73) 826.63,846.31 ; v1@816.03,1197.4 cw(c801.5,1181.77) 822.83,1181.77 ; 816.93,834.65 816.93,897.64 v1(779.53,897.64) 854.33,897.64 877.95,921.26 ; 821.38,897.64 ccw(c821.38,966.02) 869.74,917.67 ; v1(822.83,1204.72) 822.83,1181.77 ; v1@822.83,1238.03 cw(c822.83,1213.89) 839.91,1230.96 cw(c856.98,1248.03) v1@832.83,1248.03 ; v1(822.83,1248.03) 850.39,1220.47 850.39,1181.1 713.61,1044.32 713.61,819.91 680.91,787.21 680.91,756.09 692.91,744.09 ; v1@829.64,1197.4 ccw(c844.17,1181.77) 822.83,1181.77 ; 840.7,897.64 ccw(c840.7,946.7) 875.39,912.01 ; 953.97,280.35 ccw(c953.97,334.03) v1@991.93,296.07 ; 962.03,1050.3 cw(c950.26,1031.5) 972.44,1031.5 ; 972.44,1078.74 972.44,1031.5 ; 973.28,280.35 ccw(c973.28,314.72) v1@997.59,290.41 ; 982.85,1050.3 ccw(c994.62,1031.5) 972.44,1031.5 ; v1@1084,461.18 1108.82,486 1137,486 1149,474 1149,384 1175.95,357.05 ; v1@1084,469 ccw(c1084,487.87) 1097.34,474.53 ; v1@1094,459 cw(c1123.41,459) 1102.62,479.8 ; v1@1112.93,451.93 cw(c1095.86,434.86) 1120,434.86 cw(c1144.14,434.86) v1@1127.07,451.93 ; v1(1120,459) 1120,378 1180.32,317.68 ; 1161.84,336.16 ccw(c1194.2,368.51) 1194.2,322.76 ; 1175.5,322.5 ccw(c1194.2,341.2) 1194.2,314.76 ; 1181.94,317.68 ccw(c1181.94,327.2) 1188.67,320.47 ; 1181.94,357.05 ccw(c1181.94,366.58) 1188.67,359.84 ; 1186.67,312.85 ccw(c1180.32,311.09) 1180.32,317.68 ; 1187.43,350.42 ccw(c1175.95,343.8) 1175.95,357.05 ; 1217.9,317.68 1180.32,317.68 ; 1217.9,357.05 1175.95,357.05 ; 803.67,897.64 ccw(c803.67,873.5) 786.6,890.57 cw(c803.67,873.5) 803.67,897.64 ; 803.67,897.64 cw(c803.67,921.78) 786.6,904.71 ccw(c803.67,921.78) 803.67,897.64
  Bottom Layer w10: v2@233.35,236.22 ccw(c216.9,236.22) 228.53,247.85 ccw(c240.16,259.47) v2@240.16,243.03 ; v2(240.16,236.22) 143.81,332.57 143.81,730.21 106.3,767.72 106.3,814.96 336.34,1045 515,1045 ; 245,624.06 419.25,624.06 v3(460.63,582.68) ; 276.22,616.46 cw(c294.57,598.11) 294.57,624.06 cw(c294.57,650) 276.22,631.66 ; v1@446.37,790.82 cw(c424.64,790.82) 440,775.45 cw(c455.37,760.09) v1@455.37,781.82 ; 448.44,1027.66 ccw(c406.57,985.78) 406.57,1045 ccw(c406.57,1104.21) 448.44,1062.34 ; v1@449.63,705 cw(c449.63,683.27) 464.99,698.64 cw(c480.36,714) v1@458.63,714 ; v1(449.63,714) 509.63,654 v1(634,654) ; v3@453.82,582.68 ccw(c437.38,582.68) 449,594.3 ccw(c460.63,605.93) v3@460.63,589.49 ; v1(455.37,790.82) 417.32,752.78 417.32,708.12 511.45,614 v1(634,614) ; 455.51,1034.73 ccw(c430.71,1009.93) 430.71,1045 ccw(c430.71,1080.07) 455.51,1055.27 ; v1@461.43,743.53 cw(c453.28,721.65) 476.63,721.65 ; v1(464.57,751.97) 476.63,739.91 476.63,724.16 519.79,681 771,681 774,684 775.59,682.41 v1(775.59,677.16) ; v1@464.92,752.91 cw(c458.64,736.05) 476.63,736.05 ; v1@627.64,607.64 ccw(c612.27,592.27) 612.27,614 ccw(c612.27,635.73) v1@627.64,620.36 ; v1@627.64,647.64 ccw(c612.27,632.27) 612.27,654 ccw(c612.27,675.73) v1@627.64,660.36 ; v1(667.58,590.68) v1@669,589.27 ; v1@679,376 v1(683.14,380.14) ; 679.31,560.72 ccw(c642.29,605) 700,605 ; 681.35,499.31 ccw(c668.42,532.46) 704,532.46 ; v1(682.77,626.41) 681.59,626.41 679.68,628.32 679,629 685.82,629 707.82,651 763.57,651 764.41,650.16 786.77,650.16 802.59,665.98 802.59,688.35 801,689.94 801,701 816,716 877,716 944,649 ; v1@682.77,635.41 ccw(c682.77,658.22) 698.9,642.09 ; 682.83,535.19 cw(c670.66,504.15) 704,504.15 ; 684,420.53 700.73,403.8 700.73,400.73 710.14,391.32 710.14,368.96 700.73,359.55 700.73,301.21 ; 684,487.47 704,507.46 704,532.46 ; 684.98,490 ccw(c674.13,517.83) 704,517.83 ; 685.72,553.05 ccw(c660.18,583.6) 700,583.6 ; 685.97,407.82 cw(c685.97,389.29) 699.07,402.39 ; 686.47,544.5 cw(c676.41,518.81) 704,518.81 ; 688.62,480.68 ccw(c679.83,503.19) 704,503.19 ; 690.12,553.81 cw(c682.15,533.47) 704,533.47 ; v1@691.77,626.41 cw(c712.42,626.41) 697.82,641 ; 697.31,340.06 ccw(c689.04,348.33) 700.73,348.33 ccw(c712.42,348.33) 704.16,340.06 ; 698.62,419.22 ccw(c729.75,415.98) 707.62,393.85 ; v2@700.79,771.65 v2(704.72,771.65) 931.35,771.65 1135.27,567.73 1140.73,567.73 ; v2@709.54,766.84 cw(c721.17,755.21) 721.17,771.65 cw(c721.17,788.1) v2@709.54,776.47 ; v1@710,624 cw(c688.27,624) 703.64,608.64 cw(c719,593.27) v1@719,615 ; v1(719,624) 700,605 ; 728.81,340.06 ccw(c720.54,348.33) 732.23,348.33 ccw(c743.92,348.33) 735.65,340.06 ; 729,503.73 ccw(c753.97,503.73) 744.18,480.76 ; 729,518.86 ccw(c760.42,518.86) 748.1,489.96 ; v1(729,584) 779,584 789,574 789,554 779,544 739,544 729,534 ; 732.23,301.21 732.23,403.76 749,420.53 ; 732.23,354.1 cw(c813.47,354.1) 756.02,411.54 ; 732.23,378.24 cw(c789.33,378.24) 748.95,418.61 ; 732.23,402.38 cw(c765.19,402.38) 741.88,425.69 ; v1@735.36,577.64 cw(c750.73,562.27) 750.73,584 cw(c750.73,605.73) v1@735.36,590.36 ; 744.6,681 cw(c744.6,646.18) v1@769.23,670.8 ; 749,487.47 729,507.47 729,534 ; 752.02,499.16 cw(c766.87,534) 729,534 ; v1(814,744) 814,739 819,744 917.18,744 1079,582.18 1079,539 1109,509 1144,509 1166,487 1166,412 1181.58,396.42 1217.9,396.42 ; v1@820.36,737.64 cw(c835.73,722.27) 835.73,744 cw(c835.73,765.73) v1@820.36,750.36 ; v1@824.34,682.61 cw(c813.1,671.37) 829,671.37 ; 829,663.13 cw(c856.56,663.13) v1@837.07,682.61 ; v1@829.03,688.97 v1(830.71,688.97) ; v1@829,689 829,629 882.47,575.53 882.47,424 ; 864.79,896.28 cw(c833,864.49) 877.95,864.49 cw(c922.91,864.49) 891.12,896.28 ; 871.51,845.03 ccw(c855.94,860.59) 877.95,860.59 ; 873.47,434.96 ccw(c851.76,456.67) 882.47,456.67 ccw(c913.17,456.67) 891.46,434.96 ; 877.95,855.46 ccw(c902.71,855.46) 885.2,837.96 ; 877.95,879.6 ccw(c926.85,879.6) 892.27,845.03 ; 877.95,921.26 877.95,838.58 881.89,834.65 ; 938.44,1158.91 cw(c884.86,1105.33) 960.63,1105.33 ; 945.51,1165.98 cw(c909,1129.47) 960.63,1129.47 ; 948.82,1169.29 960.63,1157.48 ; 960.63,1113.5 ccw(c992.45,1113.5) 971.54,1089.51 ; 960.63,1135.49 ccw(c1011.63,1135.49) 978.11,1097.05 ; v1@961.33,658.7 cw(c944,669.32) 944,649 ; v1(969,654) 964,649 944,649 ; 972.44,1078.74 960.63,1090.55 960.63,1157.48 ; 984.68,1104.59 cw(c1030.81,1157.48) 960.63,1157.48 ; v1@1017.64,730.36 ccw(c1002.27,745.73) 1024,745.73 ccw(c1045.73,745.73) v1@1030.36,730.36 ; v1@1017.64,981.83 cw(c1002.27,966.46) 1024,966.46 cw(c1045.73,966.46) v1@1030.36,981.83 ; v1(1024,724) v1(1024,988.19) ; 1076.77,626.23 ccw(c1140.73,690.19) 1140.73,599.73 ; v1(1084,459) v1@1084,461.18 ; 1089.97,613.03 cw(c1044.68,567.73) 1108.73,567.73 ; 1093.84,609.16 ccw(c1140.73,656.05) 1140.73,589.73 ; 1107.04,595.96 cw(c1078.82,567.73) 1118.73,567.73 ; 1110.91,592.09 ccw(c1140.73,621.91) 1140.73,579.73 ; v3@1114.18,91.43 ccw(c1102.56,103.06) 1119,103.06 ccw(c1135.44,103.06) v3@1123.81,91.43 ; v2@1114.18,160.29 cw(c1102.56,148.66) 1119,148.66 cw(c1135.44,148.66) v2@1123.82,160.29 ; v3(1119,86.61) v2(1119,165.1) ; v1(1120,459) v1@1129,459 ; 1170.94,407.06 ccw(c1188.19,424.31) 1192.89,400.37 ; 700,605 700,561.53 687.47,549 704,532.46
  Bottom Layer w12: 794,394 827.52,360.48 905.48,360.48 916.96,349
  Bottom Layer w15: 916.96,349 1015.42,349 v1(1029.71,363.29) ; 979.51,349 ccw(c979.51,413.49) v1@1025.11,367.89 ; 1015.73,349 ccw(c1015.73,377.27) v1@1035.72,357.28 ; v1@1023.21,363.29 cw(c1007.52,363.29) 1018.61,352.2 cw(c1029.71,341.1) v1@1029.71,356.79 ; 1189,456.01 ccw(c1217.15,456.01) 1197.25,436.1 ; 1189,464 1189,444 1197.21,435.79 1217.9,435.79
  Bottom Layer w20: 245,565 320.83,565 350.39,535.43 v1(350.39,500) ; 763.73,273.78 763.73,301.21 763.73,363.73 794,394 815.53,415.53 815.53,424 ; 797.77,397.77 ccw(c773.51,422.03) 807.82,422.03 ; v1(950.11,254.35) 1003.65,254.35 1021.13,236.87 v1(1054,236.87) ; v1(969,534) 969,549 1014,594 v1(1019,594) ; v1@973,534 cw(c1018.87,534) 986.44,566.44 ; 1003.64,583.64 cw(c1019,568.27) v1@1019,590 ; v1@1086.17,406.17 cw(c1057.62,377.62) 1098,377.62 ; v1(1089,409) 1089,414 1098,405 1098,360 v1(1129,329)
  Bottom Layer w22: v1(134,779) 172.7,779 173.23,779.53
  Bottom Layer w25: v1(49,1144) 30.23,1125.23 30.23,298.29 v3(49,279.53) 84.43,244.09 165.35,244.09 251.32,158.13 1059.7,158.13 1175.57,274 1262.19,274 1277.94,289.75 1277.94,458.28 1262.22,474 v1(1224,474) ; 245,505.94 297.2,505.94 307.09,496.06 307.09,405.51 357.6,355 v1(410,355) ; 882.47,424 940.53,424
  Bottom Layer w30: 32.73,437.01 32.77,437.05 87.52,437.05 ; 32.73,692.91 32.77,692.95 87.52,692.95 ; 67.4,426.77 ccw(c42.6,401.97) 42.6,437.05 ccw(c42.6,472.12) 67.4,447.32 ; 67.4,682.68 ccw(c42.6,657.88) 42.6,692.95 ccw(c42.6,728.03) 67.4,703.23 ; v1(282.04,225.83) 282.04,277.02 173.23,385.83 173.23,818.23 300,945 515,945 ; v1(410,355) v1(467.08,412.08) ; 455.51,934.73 ccw(c430.71,909.93) 430.71,945 ccw(c430.71,980.07) 455.51,955.27 ; v1@563,534.07 cw(c579,532.96) 579,549 ; v1@563.29,534.71 cw(c597.8,500.2) 597.8,549 ; v1(564,534) 579,549 ; 620.53,549 579,549 ; 855.26,297.27 863.53,289 v1(909,289) ; 874.53,304.88 ccw(c909,334.33) v1(909,289) ; 875.11,272.64 cw(c909,245.73) v1(909,289)
  Bottom Layer w35: 1340.73,560.73 1340.73,567.73
  Bottom Layer w85: 1240.73,567.73 1240.73,667.73 1240.73,767.73 1240.73,887.73 1240.73,987.73 1240.73,1087.73 ; 1340.73,567.73 1340.73,667.73 1340.73,767.73 1340.73,887.73 1340.73,987.73 1340.73,1087.73
  other v1: 562.99,200.79

## Polygon pours and split planes (outlines as drawn)
no net on Top Layer "Top-VCC" (solid, remove dead copper, pour order 3): 0.73,109 0.73,1309.79 cw(c109,1309.79) 109,1418.06 1309.79,1418.06 cw(c1309.79,1309.79) 1418.06,1309.79 1418.06,109 cw(c1309.79,109) 1309.79,0.73 109,0.73 cw(c109,109)
no net on Bottom Layer "Bottom Layer-GND" (solid, remove dead copper, pour order 4): 0.73,109 0.73,1309.79 cw(c109,1309.79) 109,1418.06 1309.79,1418.06 cw(c1309.79,1309.79) 1418.06,1309.79 1418.06,109 cw(c1309.79,109) 1309.79,0.73 109,0.73 cw(c109,109)

## Keep-outs
Top Layer:
  circle w3.94: c109,109 r106.3
  circle w3.94: c1309.79,109 r106.3
  circle w3.94: c109,1309.79 r106.3
  circle w3.94: c1309.79,1309.79 r106.3
Bottom Layer:
  circle w3.94: c1309.43,1310.73 r106.3
  circle w3.94: c109.43,1310.73 r106.3
  circle w3.94: c109.43,110.73 r106.3
  circle w3.94: c1309.43,110.73 r106.3
Keep-Out Layer:
  circle w3.94: c1309.79,109 r59.06
  circle w3.94: c109,109 r59.06
  circle w3.94: c1309.79,1309.79 r59.06
  circle w3.94: c109,1309.79 r59.06
  lines w10: 0.73,109 ccw(c109,109) 109,0.73 1309.79,0.73 ccw(c1309.79,109) 1418.06,109 1418.06,1309.79 ccw(c1309.79,1309.79) 1309.79,1418.06 109,1418.06 ccw(c109,1309.79) 0.73,1309.79 0.73,109

## Other copper
Top Layer:
  pour cut-out: 90,435 185,435 185,255 90,255
  pour cut-out: 614.17,1283.46 807.09,1283.46 807.09,1082.68 614.17,1082.68

## Silkscreen, mask and mechanical layers (free items; w line width, h text height)
Top Overlay:
  circle w10: c969,329 r5
  lines w7: 1124,1169 1139,1154 ; 1139,1194 1139,1154 ; 1154,1169 1139,1154
  text "+3.3V" at 1099,1359 h50
  text "SBL" at 1104,1304 h50
  text "Sig" at 1109,1209 h50
  text "-" at 1330.73,1169.73 h90
  text "+" at 1225.73,1164.73 h80
  text "Status" at 59,1124 h60
  text "1" at 1034,1084 h65
  text "2" at 1034,984 h65
  text "Power" at 64,934 h60
  text "CC3D" at 377.95,900 h100
  text "3" at 1034,884 h65
  text "" at 551.18,799.21 h137.8 r90
  text "4" at 1034,759 h65
  text "5" at 1034,659 h65
  text "6" at 1034,559 h65
  text "Sig" at 1099,474 h50
  text "-" at 1329,454 h90
  text "+" at 1244,449 h80
  text "Flexi" at 209,144 h55
  text "Main" at 1094,144 h50
  text "Port" at 219,104 h55
  text "Port" at 1094,104 h55
Bottom Overlay:
  lines w7: 1129,1164 1144,1149 ; 1144,1209 1144,1149 ; 1159,1164 1144,1149
  text "B" at 1043.69,1284.57 h160
  text "Rev. C" at 1006.69,1234.57 h60
  text "Sig" at 1189,1229 h80
  text "-" at 1330.73,1190.73 h90
  text "+" at 1225.73,1185.73 h80
  text "S.Bus" at 330.71,732.28 h39.37
  text "GND" at 1174,424 h30
  text "NRST" at 1174,389 h30
  text "DSM2" at 192.91,350.39 h39.37
  text "IO" at 1174,349 h30
  text "CLK" at 1173.23,303.15 h30
  text "DSMX" at 192.91,283.46 h39.37
  text "SWD" at 1324,179 h40
  text "Copter" at 1230.73,120.73 h80
  text "3D" at 415.73,65.73 h120
  text "Control" at 1230.73,50.73 h80
Bottom Solder:
  text "A" at 570.87,1153.54 h300
Mechanical 1:
  the board outline again, w10
Dimensions:
  text "U2更改为HT7533 SOT89,提高额外的功率给DSM2接口供电" at -267.72,1850.39 h60
  text "MPU6000向左旋转90度,更改CC3D默认飞行方向,USB在侧面,便于插拔usb数据线" at -259.84,1740.16 h60
  text "增加DSM2和S.BUS硬件接口" at -267.72,1637.8 h60
  text "CONN1缓冲更改为6个470欧电阻" at -267.72,1551.18 h60
Mechanical 15:
  lines w7: 604,1076.17 814,1076.17 814,1286.17 604,1286.17 604,1076.17
Mechanical 16:
  lines w10: 239,709 239,984 414,984 414,709 239,709

## Dimensions
1268.03,1351.55 to -2431,-1944 on Dimensions
-18.95,0.73 to -18.95,1418.06 on Dimensions
-18.95,109 to -18.95,1309.79 on Dimensions
109,-18.95 to 1309.79,-18.95 on Dimensions
0.73,-18.95 to 1418.06,-28.79 on Dimensions